# Altium PCB MC33886_driver_board.PcbDoc
Units mm, origin at the board's own origin, x right, y up, seen from the top; angles counter-clockwise.
Board outline 40 x 30 mm, 2 copper layers (Top Layer, Bottom Layer), stack 1.571 mm thick; 25 components, 22 nets, 114 pads, 133 vias.
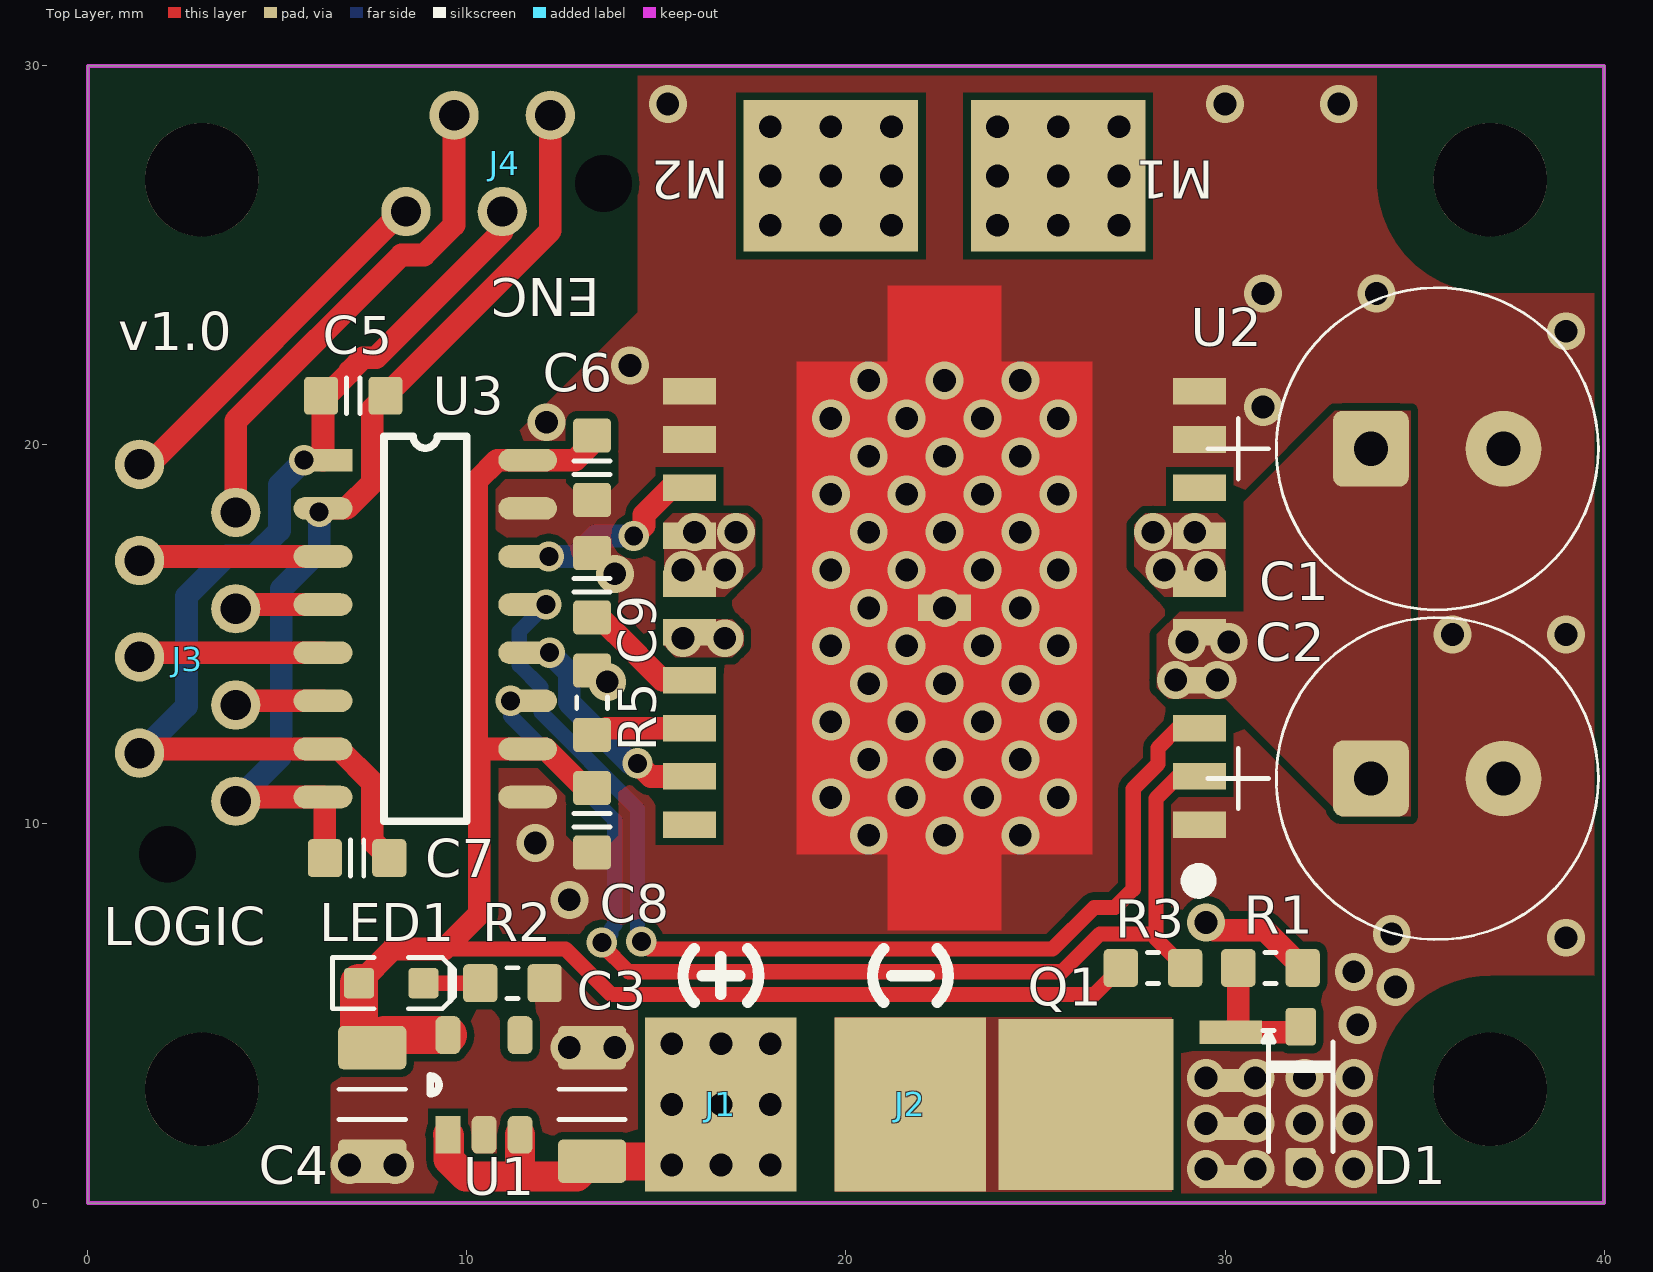
[diagram p0: Top Layer view]
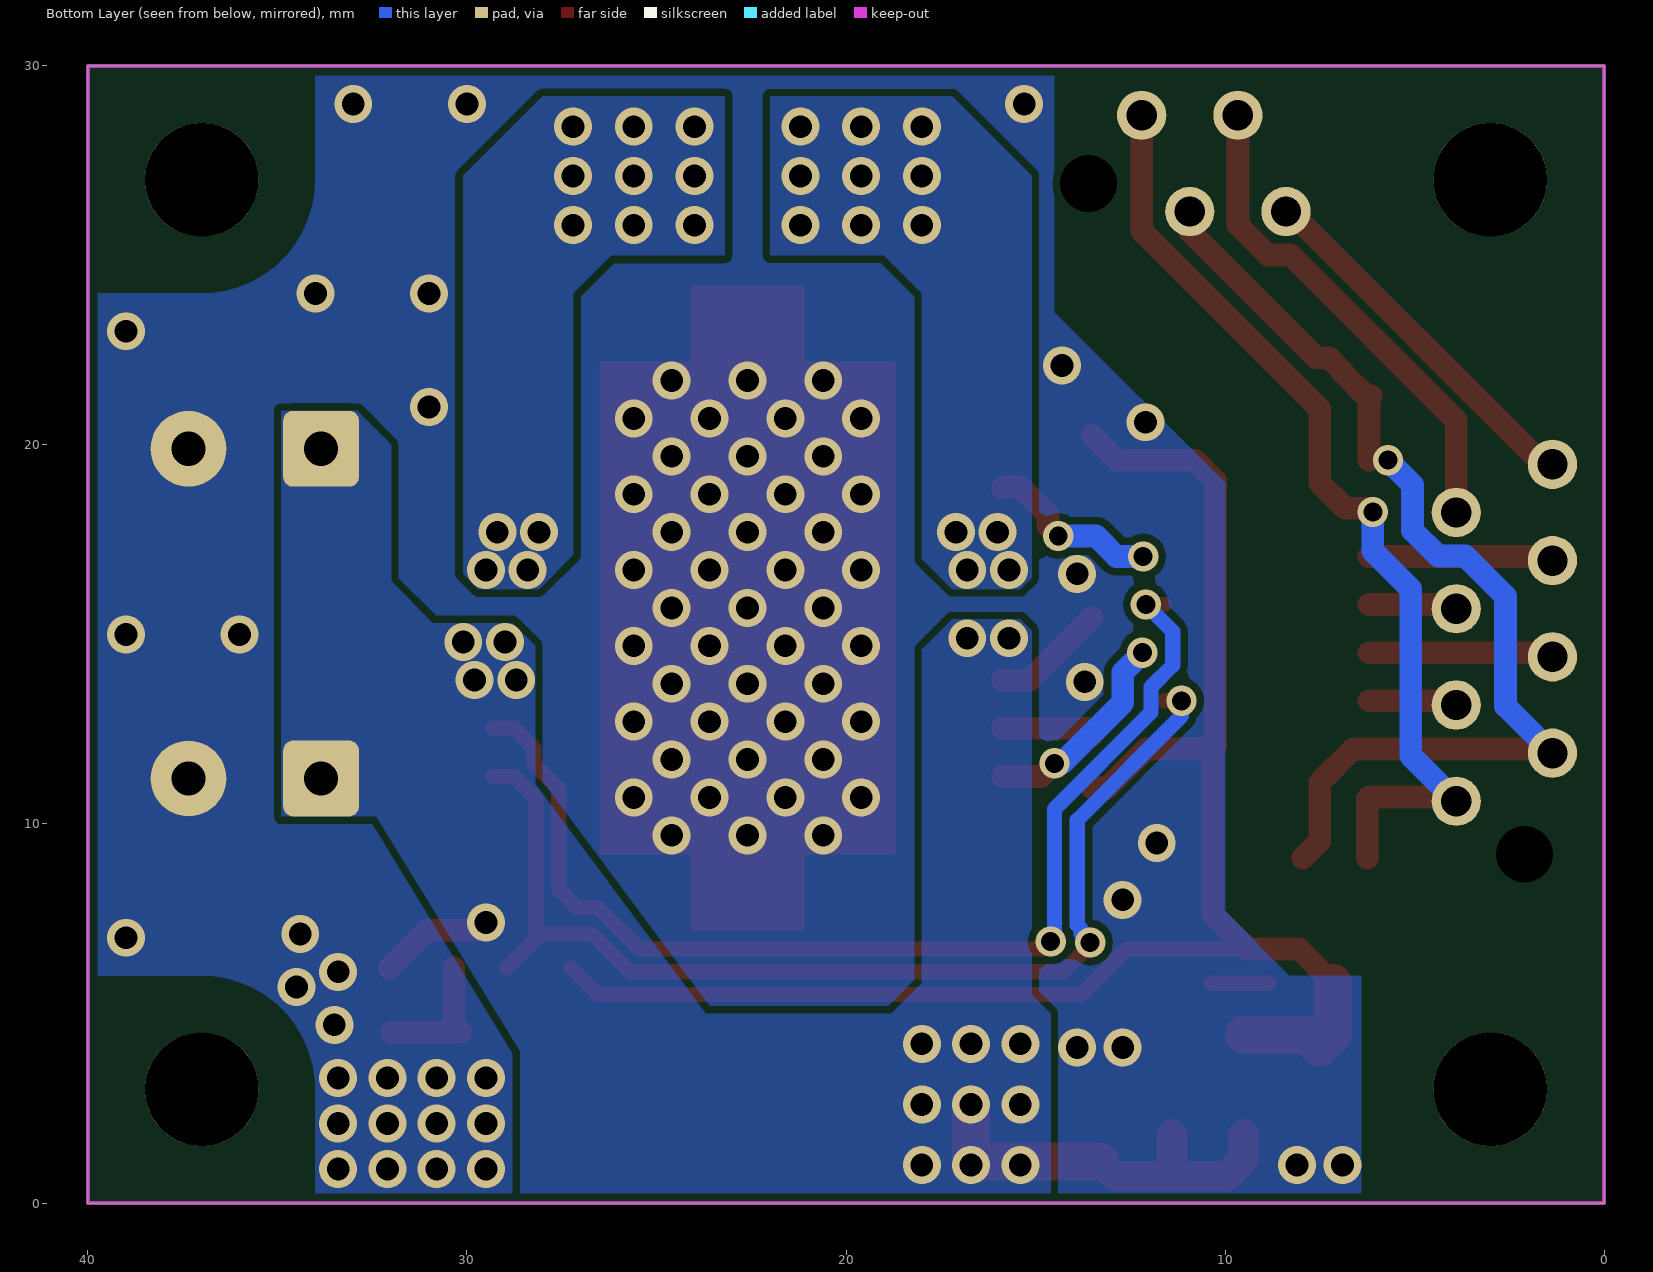
[diagram p1: Bottom Layer view, seen from below]

## Layer stack, top to bottom
Top Solder: solder mask 0.0102, Solder Resist, Dk 3.5
Top Layer: signal copper 0.0356
Dielectric 1: dielectric 1.5, FR-4, Dk 4.8
Bottom Layer: signal copper 0.0356
Bottom Solder: solder mask 0.0102, Solder Resist, Dk 3.5

## Board outline
0,0 0,30 40,30 40,0

## Design rules (kind name [scope] priority, off if disabled: settings)
Clearance [All] p1: gap=0.2 ignorepadtopadclearanceinfootprint=FALSE except(0: Arc-Hole Track-Hole SMDPad-Hole THPad-Hole Via-Hole Fill-Hole Poly-Hole Region-Hole Text-Hole)
ComponentClearance [All] p1: gap=0.2 collisioncheckmode=3 verticalgap=0.2 showdistances=FALSE
PolygonConnect [All] p1: connectstyle=Direct reliefconductorwidth=0.254 reliefentries=4 polygonreliefangle="90 Angle" airgapwidth=0.254
RoomDefinition MC33886_driver_board [InComponentClass('MC33886_driver_board')] p1: confinementstyle=ConfineIn formatcopy=TRUE lockcomponents=FALSE outline -15,-15 112,-15 112,77 -15,77
RoutingVias [All] p1: holewidth=0.6 width=1 viastyle="Through Hole" minholewidth=0.5 minwidth=0.8 maxholewidth=5 maxwidth=10
SolderMaskExpansion SolderMaskExpansionTentedVia [IsVia And (Not IsTestpoint)] p1: expansion=-5
SolderMaskExpansion [All] p2: expansion=0.102
Width [All] p1: maxlimit=10 minlimit=0.3 preferedwidth=0.4 minimp=50.000000 maximp=50.000000 favimp=50.000000
29 further rules are at their usual default settings.

## Components (designator, comment, footprint, x,y, rotation, side; value= is the part's Value field where it differs from the comment)
C1 "220u" CAPE3.5mm 35.6,19.9 r0 top value=220µ
C2 "220u" CAPE3.5mm 35.6,11.2 r0 top value=220µ
C3 "10u" CAPC3216X180N 13.3,2.6 r90 top value=10µ
C4 "10u" CAPC3216X180N 7.5,2.6 r270 top value=10µ
C5 "100n" CAPC1608X90N 7,21.3 r180 top value=10n
C6 "100n" CAPC1608X90N 13.3,19.4 r90 top value=10n
C7 "100n" CAPC1608X90N 7.1,9.1 r0 top value=10n
C8 "100n" CAPC1608X90N 13.3,10.1 r90 top value=10n
C9 "33n" CAPC1608X90N 13.3,16.3 r90 top value=10n
D1 "12V" SOD123 32,2.8 r270 top
J1 "12V_IN" POWER-PAD 16.7,2.6 r0 top
J2 "GND_IN" POWER-PAD 21.7,2.6 r0 top
J3 "LOGIC" MICRO-MATCH-8 3.9,10.6 r270 top
J4 "ENC" MICRO-MATCH-4 12.2,28.7 r0 top
LED1 "White" LED-0603-GREEN 8,5.8 r0 top
M1 "HEADER-1" POWER-PAD 25.6,27.1 r270 top
M2 "HEADER-1" POWER-PAD 19.6,27.1 r90 top
Q1 "MOSFET-N" SOT669 27.5,2.6 r180 top
R1 "100k" RESC1608X55N 31.2,6.2 r180 top value=1K
R2 "1k" RESC1608X55N 11.2,5.8 r0 top value=1K
R3 "10k" RESC1608X55N 28.1,6.2 r0 top value=1K
R5 "10k" RESC1608X55N 13.3,13.2 r90 top value=1K
U1 "LDO-SOT23-5" SOT23-5 9.5,1.8 r90 top
U2 "MC33886" MC33886 22.6,15.7 r180 top
U3 "SI8641" SOIC16 6.2,19.6 r0 top

## Footprints (in the part's own frame and the unit in brackets; to place one, negate y for a bottom-side part, rotate by r counter-clockwise, add the part's x,y. Pads: shape width x height; smd on the part's side, far side on the other; paste and mask are expansions set on the pad)
CAPC1608X90N [mm] "Chip Capacitor, Body 1.6x0.8mm, EIA 0603, IPC Medium Density"
  round 0.254 on Mech15: 0(0,0)
  rrect25% 0.9x1 smd: 1(-0.85,0) 2(0.85,0)
  Top Layer pour cut-out: -0.6,0.5 -0.4,0.7 0.4,0.7 0.6,0.5 0.6,-0.5 0.4,-0.7 -0.4,-0.7 -0.6,-0.5
  silkscreen extent -0.18,-0.48 0.18,0.48, body extent -0.85,-0.45 0.85,0.45, height 0.89
CAPC3216X180N [mm] "Chip Capacitor, Body 3.2x1.6mm, 1.8mm H, EIA 1206, IPC Medium Density"
  round 0.508 on Mech15: 0(0,0)
  rrect25% 1.15x1.8 smd: 1(-1.5,0) 2(1.5,0)
  silkscreen extent -0.4,-0.88 0.4,0.88, body extent -1.7,-0.9 1.7,0.9, height 1.8
CAPE3.5mm [mm]
  round 0.508 on Mech15: 0(0,0)
  rrect25% 2x2 hole 0.9: 1(-1.75,0)
  round 2 hole 0.9: 2(1.75,0)
  silkscreen extent -6.05,-4.25 4.25,4.25, body extent -4.25,-4.25 4.22,4.23, height 7.1
LED-0603-GREEN [mm]
  round 0.254 on Mech15: 0(0,0)
  rrect25% 0.8x0.8 smd: A(-0.85,0) K(0.85,0)
  Top Layer pour cut-out: -0.5,0.5 0.5,0.5 0.5,-0.5 -0.5,-0.5
  silkscreen extent -1.55,-0.67 1.68,0.67, body extent -0.8,-0.4 0.8,0.4, height 0.75
MC33886 [mm]
  rect 1.4x0.7 smd: 1(-6.731,5.715) 2(-6.731,4.445) 3(-6.731,3.175) 4(-6.731,1.905) 5(-6.731,0.635) 6(-6.731,-0.635) 7(-6.731,-1.905) 8(-6.731,-3.175) 9(-6.731,-4.445) 10(-6.731,-5.715) 11(6.731,-5.715) 12(6.731,-4.445) 13(6.731,-3.175) 14(6.731,-1.905) 15(6.731,-0.635) 16(6.731,0.635) 17(6.731,1.905) 18(6.731,3.175) 19(6.731,4.445) 20(6.731,5.715) 21(0,0)
  Top Layer region: -1.5,6.5 -1.5,8.5 1.5,8.5 1.5,6.5 3.9,6.5 3.9,-6.5 1.5,-6.5 1.5,-8.5 -1.5,-8.5 -1.5,-6.5 -3.9,-6.5 -3.9,6.5
  silkscreen extent -6.92,6.98 -6.48,7.42, body extent -7.12,-8 7.13,8, height 3.21
MICRO-MATCH-4 [mm]
  round 1.3 hole 0.8: 1(0,0) 2(-1.27,-2.54) 3(-2.54,0) 4(-3.81,-2.54)
  round 0 hole 1.5 unplated: drill(1.4,-1.8)
  body extent -5.41,-3.77 1.6,1.23, height 4
MICRO-MATCH-8 [mm]
  round 1.3 hole 0.8: 1(0,0) 2(-1.27,-2.54) 3(-2.54,0) 4(-3.81,-2.54) 5(-5.08,0) 6(-6.35,-2.54) 7(-7.62,0) 8(-8.89,-2.54)
  round 0 hole 1.5 unplated: drill(1.4,-1.8)
  body extent -10.49,-3.77 1.6,1.23, height 4
POWER-PAD [mm]
  rect 4x4.6 smd: 1(0,0)
RESC1608X55N [mm] "Chip Resistor, Body 1.6x0.8mm, EIA 0603, IPC Medium Density"
  round 0.254 on Mech15: 0(0,0)
  rrect25% 0.9x1 smd: 1(-0.85,0) 2(0.85,0)
  Top Layer pour cut-out: -0.6,0.5 -0.4,0.7 0.4,0.7 0.6,0.5 0.6,-0.5 0.4,-0.7 -0.4,-0.7 -0.6,-0.5
  silkscreen extent -0.15,-0.41 0.15,0.41, body extent -0.87,-0.47 0.88,0.48, height 0.54
SOD123 [mm] "SOD-123; 2 Leads; Body 2.7 x 1.6 mm, (LxW)"
  round 0.508 on Mech15: 0(0,0)
  rrect25% 1x0.8 smd: A(1.85,0) K(-1.85,0)
  silkscreen extent -1.75,-1 1.45,0.85, body extent -1.95,-0.9 1.95,0.9, height 1.18
SOIC16 [mm]
  rect 1.55x0.6 smd: 1(0,0)
  oval 1.55x0.6 smd: 2(0,-1.27) 3(0,-2.54) 4(0,-3.81) 5(0,-5.08) 6(0,-6.35) 7(0,-7.62) 8(0,-8.89) 9(5.4,-8.89) 10(5.4,-7.62) 11(5.4,-6.35) 12(5.4,-5.08) 13(5.4,-3.81) 14(5.4,-2.54) 15(5.4,-1.27) 16(5.4,0)
  silkscreen extent 1.61,-9.53 3.79,0.64, body extent -0.25,-9.42 5.66,0.57, height 1.46
SOT23-5 [mm]
  rect 1x0.66 smd: 1(0,0)
  rrect50% 1x0.66 smd: 2(0,-0.95) 3(0,-1.9) 4(2.63,-1.9) 5(2.63,0)
  silkscreen extent 1.08,0.24 1.55,0.48, body extent 0.1,-2.48 2.6,0.53, height 1.11
SOT669 [mil]
  rect 182x178 smd: D(46,0)
  rect 65x24 smd: G(-104.33,-75) S(-104.33,75) S(-104.33,-25) S(-104.33,25)
  body extent -125,-99 135,97, height 43

## Part data
C1 C2: library part CAPE_220u_16V_THD, "Capacitor THT Alum Elec 220uF 20% 16V", Manufacturer 1=Nichicon, Manufacturer 2="Zhuhai Gree Xinyuan Electric", Manufacturer Part Number 1=UPW1C221MPD, Manufacturer Part Number 2=CD11C-220-16V, Package / Case="radial 8.0D x 7.0H x 3.5mm pitch", Ratings="16V; 80°C", Supplier Part Number 1=493-1783-ND, Tolerance=±20%, Material=Al, SCDType=undef, Supplier 1=Digi-Key
C3 C4: library part CAPC_10u_1206_16V, "Capacitor SMD Cer 10uF 10% 16V X7R 1206", Manufacturer 1=Kemet, Manufacturer Part Number 1=C1206C106K4RACTU, Package / Case="1206 (3216 metric)", Ratings="16V; X7R", Supplier Part Number 1=399-3525-1-ND, Tolerance=±10%, Material=ceramic, SCDType=spec, Supplier 1=Digi-Key
C5 C6 C7 C8 C9: library part CAPC_10n_0603_X7R_50V_10%, "Capacitor SMD Cer 10nF 10% 50V X7R 0603", Manufacturer 1="TDK Corporation", Manufacturer 2="AVX Corporation", Manufacturer Part Number 1=C1608X7R1H103K, Manufacturer Part Number 2=06035C103KAT2A, Package / Case="0603 (1608 metric)", Ratings="50V; X7R", Supplier Part Number 1=445-1311-1-ND, Tolerance=±10%, ComponentLink1Description=http://product.tdk.com/capacitor/mlcc/en/documents/mlcc_commercial_general_en.pdf, ComponentLink1URL=http://product.tdk.com/capacitor/mlcc/en/documents/mlcc_commercial_general_en.pdf, ComponentLink2Description=http://www.avx.com/docs/Catalogs/cx7r.pdf, ComponentLink2URL=http://www.avx.com/docs/Catalogs/cx7r.pdf, Material=ceramic, SCDType=spec, Supplier 1=Digi-Key, Supplier 2=Digi-Key, Supplier Part Number 2=478-1227-1-ND
D1: library part DIODE_ZENER_28V_500mW, "Diode Zener SMD 28V 0.5W SOD-123", Manufacturer 1="ON Semiconductor", Manufacturer Part Number 1=MMSZ5255BT1G, Package / Case=SOD-123, Ratings="28V; 0.5W", Supplier Part Number 1=MMSZ5255BT1GOSCT-ND, Tolerance=±5%, Diode Type=Zener, Material=Si, SCDType=source, Supplier 1=Digi-Key
J1 J2: library part HEADER-1
J3: library part HEADER-8
J4: library part HEADER-4
LED1: library part LED_SMD_Green_0603_570nm, "LED 0603 SMD Green 570nm 50mcd 20mA", Color=Green, Current - Test=20mA, Manufacturer 1="Kingbright Company LLC", Manufacturer Part Number 1=APT1608CGCK, Package / Case="0603 (1608 metric)", Ratings="20mcd min; 50 mcd typ; 570 nm", Supplier Part Number 1=754-1116-1-ND, Voltage - Forward (Vf) @ 10mA=2.0V, Voltage - Forward (Vf) Typ=2.1V, ComponentLink1Description=http://www.us.kingbright.com/images/catalog/SPEC/APT1608CGCK.pdf, ComponentLink1URL=http://www.us.kingbright.com/images/catalog/SPEC/APT1608CGCK.pdf, Lens Style/Size="Rectangle with Flat Top, 1.1mm x 0.8mm", Lens Type=Clear, Material=AlGaInP, RoHS 1="RoHS Compliant", SCDType=source, Supplier 1=Digi-Key, Viewing Angle=120°, Wavelength - Dominant=570nm, Wavelength - Peak=574nm
R1 R2 R3 R5: library part RES_1K_0603_1%, "Resistor SMD chip 1k Ohm 0.1W 1% 0603", Manufacturer 1=Yageo, Manufacturer Part Number 1=RC0603FR-071KL, Package / Case="0603 (1608 Metric)", Ratings=1/10W, Supplier Part Number 1=311-1.00KHRCT-ND, Tolerance=±1%, SCDType=spec, Supplier 1=Digi-Key
Q1: PROD_ID=IC-08089

## Free pads (board coordinates)
  round 3 hole 3 unplated: hole(3,3) hole(3,27) hole(37,3) hole(37,27)

## Via types
v1: diameter 1, hole 0.6, Top Layer to Bottom Layer, 123 vias
v2: diameter 0.8, hole 0.5, Top Layer to Bottom Layer, 10 vias

## Nets (pads, with @x,y where several pads share a name; then routed paths per layer and width w, separated by ;. In a path a pad name is that pad's centre, name@x,y a point inside that pad or via, vN(x,y) a via of type N, cw(c..) or ccw(c..) an arc to the next point about the centre after c; other vN are vias at no path point)
12V: C1.1 C2.1 C3.1 J1.1 R1.1 U1.1 U1.3 U2.4 U2.5 U2.16 | length 13.9
  Top Layer w0.6: v1(29.5,7.4) 29.7,7.2 31.05,7.2 R1.1
  Top Layer w0.8: U1.1 9.52,1.78 9.52,1.148 9.968,0.7 11.6,0.7 ; U1.3 11.4,0.9 11.6,0.7 ; C3.1 12.9,0.7 11.6,0.7
  Top Layer w1: C3.1 16.7,1.1 v1(16.7,2.6)
  other v1: 15.4,1 16.7,1 18,1 15.4,2.6 18,2.6 15.4,4.2 16.7,4.2 18,4.2 28.7,13.8 29.8,13.8 29,14.8 30.1,14.8 15.7,14.9 16.8,14.9
A5V: C5.2 C7.2 J3.2 J4.2 U3.1 U3.7 | length 27.5
  Top Layer w0.6: J3.2 1.47,11.98 U3.7 6.62,11.98 7.5,11.1 7.5,9.55 C7.2 ; U3.1 6.2,21.25 C5.2 6.288,21.3 6.9,21.912 6.9,21.941 7.259,22.3 7.6,22.3 10.93,25.63 J4.2
  Bottom Layer w0.6: J3.2 2.6,13.11 2.6,16.006 3.664,17.07 4.376,17.07 5.05,17.744 5.05,18.95 v2(5.7,19.6)
AGND: C5.1 C7.1 J3.1 J4.1 U3.2 U3.8 | length 25.9
  Top Layer w0.6: J3.1 4.01,10.71 U3.8 6.25,10.66 C7.1 ; v2(6.1,18.23) U3.2 6.83,18.33 7.5,19 7.5,20.95 C5.1 12.2,25.65 J4.1
  Bottom Layer w0.6: J3.1 5.1,11.8 5.1,16.2 6.1,17.2 v2(6.1,18.23)
DIR1: J3.5 U3.4 | length 2.3
  Top Layer w0.6: J3.5 4.01,15.79 U3.4
DIR1_D: U2.3 U3.13 | length 30.1
  Top Layer w0.4: U3.13 v2(12.09,15.79) ; v2(14.6,6.9) 14.8,6.7 25.451,6.7 26.551,7.8 27.1,7.8 27.577,8.277 27.577,10.926 28.231,11.58 28.231,12.005 28.751,12.525 U2.3
  Bottom Layer w0.4: v2(12.09,15.79) 11.38,15.08 11.38,14.189 11.95,13.619 11.95,12.95 14.5,10.4 14.5,7.083 14.459,7.041 v2(14.6,6.9)
DIR2: J3.4 U3.5 | length 4.9
  Top Layer w0.6: J3.4 1.47,14.52 U3.5
DIR2_D: U2.19 U3.12 | length 5.5
  Top Layer w0.6: v2(14.5,11.6) 14.845,11.255 U2.19
  Bottom Layer w0.6: v2(12.18,14.52) 12.7,14 12.7,13.2 14.3,11.6 v2(14.5,11.6)
ENCA: J3.7 J4.3 | length 13.2
  Top Layer w0.6: J3.7 3.9,20.641 8.269,25.01 8.866,25.01 9.66,25.804 J4.3
ENCB: J3.8 J4.4 | length 9.8
  Top Layer w0.6: J3.8 1.617,19.49 8.287,26.16 J4.4
FAULT: J3.3 U3.6 | length 2.3
  Top Layer w0.6: J3.3 4.01,13.25 U3.6
FAULT_D: R3.2 U2.2 U3.11 | length 29.6
  Top Layer w0.4: v2(11.15,13.25) U3.11 ; v2(13.558,6.873) 13.558,6.81 14.269,6.1 25.7,6.1 26.573,6.973 26.7,7.1 28.05,7.1 ; R3.2 28.177,6.973 28.177,10.677 28.755,11.255 U2.2
  Bottom Layer w0.4: v2(11.15,13.25) 11.15,12.85 13.9,10.1 13.9,7.331 13.8,7.231 13.8,7.1 13.573,6.873 v2(13.558,6.873)
NetC9_1: C9.1 U2.17 | length 3.1
  Top Layer w0.6: C9.1@13.5,15.45 13.9,15.05 13.914,15.05 14.5,14.464 14.5,14.45 15.155,13.795 U2.17
NetD1_K: D1.K Q1.G R1.2 | length 3.6
  Top Layer w0.6: R1.2 30.35,4.705 Q1.G D1.K@32,4.505
NetJ2_1: J2.1 Q1.D
NetLED1_K: LED1.K R2.1 | length 1.5
  Top Layer w0.4: LED1.K R2.1
NetM1_1: M1.1 U2.6 U2.7
  other v1: 28.4,16.7 29.5,16.7 28.1,17.7 29.2,17.7 24,25.8 25.6,25.8 27.2,25.8 24,27.1 25.6,27.1 27.2,27.1 24,28.4 25.6,28.4 27.2,28.4
NetM2_1: M2.1 U2.14 U2.15
  other v1: 15.7,16.7 16.8,16.7 16,17.7 17.1,17.7 18,25.8 19.6,25.8 21.2,25.8 18,27.1 19.6,27.1 21.2,27.1 18,28.4 19.6,28.4 21.2,28.4
NetR5_1: R5.1 U2.18 | length 2.6
  Top Layer w0.4: R5.1@13.5,12.35 R5.1@13.5,12.525
  Top Layer w0.6: R5.1@13.5,12.35 13.675,12.525 U2.18
P5V: C4.1 C6.2 C8.2 LED1.A R3.1 U1.5 U3.10 U3.16 | length 45.4
  Top Layer w0.4: 9.4,6.7 12.6,6.7 12.9,6.4 13.8,5.5 26.55,5.5 R3.1
  Top Layer w0.6: LED1.A 8.05,6.7 9.4,6.7 10.325,7.625 10.325,12 ; C8.2@13.5,10.95 C8.2 13.105,10.95 12.075,11.98 U3.10 10.345,11.98 10.325,12 ; C6.2@13.5,20.25 12.85,19.6 U3.16 10.8,19.6 10.25,19.05 10.25,12.075 10.325,12
  Top Layer w1: LED1.A 7.15,4.45 C4.1 7.83,4.43 U1.5
PGND: C1.2 C2.2 C3.2 C4.2 C6.1 C8.1 C9.2 D1.A Q1.S R2.2 R5.2 U1.2 U2.1 U2.9 U2.10 U2.11 U2.12 U2.21 U3.9 U3.15
  other v1: 29.5,0.9 30.8,0.9 32.1,0.9 33.4,0.9 6.9,1 8.1,1 29.5,2.1 30.8,2.1 32.1,2.1 33.4,2.1 29.5,3.3 30.8,3.3 32.1,3.3 33.4,3.3 12.7,4.1 13.9,4.1 33.5,4.7 34.5,5.7 33.4,6.1 39,7 34.4,7.1 12.7,8 11.8,9.5 20.6,9.7 22.6,9.7 24.6,9.7 19.6,10.7 21.6,10.7 23.6,10.7 25.6,10.7 20.6,11.7 22.6,11.7 24.6,11.7 19.6,12.7 21.6,12.7 23.6,12.7 25.6,12.7 20.6,13.7 22.6,13.7 24.6,13.7 13.7,13.75 19.6,14.7 21.6,14.7 23.6,14.7 25.6,14.7 36,15 39,15 20.6,15.7 22.6,15.7 24.6,15.7 13.9,16.6 19.6,16.7 21.6,16.7 23.6,16.7 25.6,16.7 20.6,17.7 22.6,17.7 24.6,17.7 19.6,18.7 21.6,18.7 23.6,18.7 25.6,18.7 20.6,19.7 22.6,19.7 24.6,19.7 12.1,20.6 19.6,20.7 21.6,20.7 23.6,20.7 25.6,20.7 31,21 20.6,21.7 22.6,21.7 24.6,21.7 14.3,22.1 39,23 31,24 34,24 15.3,29 30,29 33,29
PWM: J3.6 U3.3 | length 4.9
  Top Layer w0.6: J3.6 1.47,17.06 U3.3
PWM_D: U2.13 U3.14 | length 4.4
  Top Layer w0.4: U2.13 U2.13@15.869,18.9
  Top Layer w0.6: v2(14.4,17.6) 14.669,17.869 14.669,18.162 15.407,18.9 15.834,18.9 15.839,18.895 15.844,18.9 U2.13
  Bottom Layer w0.6: v2(12.16,17.06) 12.86,17.06 13.4,17.6 v2@14.15,17.6
pads on no net: C1.0 C2.0 C3.0 C4.0 C5.0 C6.0 C7.0 C8.0 C9.0 D1.0 J3.drill J4.drill LED1.0 R1.0 R2.0 R3.0 R5.0 U1.4 U2.8 U2.20

## Polygon pours and split planes (outlines as drawn)
NetM2_1 on Bottom Layer "Top Layer-No Net" (solid, pour order 2): 15.1,16.5 15.1,27.1 17.2,29.2 22,29.2 22,25 19,25 18,24 18,17 17.2,16.2 15.4,16.2
NetM1_1 on Bottom Layer "Top Layer-No Net" (solid, pour order 4): 30.1,16.6 30.1,27.1 28,29.2 23.2,29.2 23.2,25 26.2,25 27.2,24 27.2,17.1 28.1,16.2 29.7,16.2
12V on Bottom Layer "Top Layer-No Net" (solid, pour order 6): 15.1,15.1 15.1,5.5 14.6,5 14.6,0 28.6,0 28.6,4 32.389,10.2 34.9,10.2 34.9,20.9 32.9,20.9 32,20 32,16.4 30.9,15.3 28.8,15.3 28.2,14.7 28.2,11.065 23.7,5 18.8,5 18,5.8 18,14.6 17.2,15.4 15.4,15.4
PGND on Bottom Layer "Top Layer-No Net" (solid, pour order 24): 6.4,0 34,0 34,3 cw(c37,3) 37,6 40,6 40,24 37,24 cw(c37,27) 34,27 34,30 14.5,30 14.5,23.5 10,19 10,7.7 8.3,6 6.4,6
12V on Top Layer "Top Layer-No Net" (solid, pour order 10): 34.9,20.9 32.9,20.9 30.5,18.5 30.5,15.6 28.8,15.6 28.2,15 28.2,13.6 28.5,13.3 30,13.3 33.1,10.2 34.9,10.2
NetM2_1 on Top Layer "Top Layer-No Net" (solid, pour order 12): 15.2,16 15.2,18 15.4,18.2 17.4,18.2 17.6,18 17.6,16.8 16.8,16
12V on Top Layer "Top Layer-No Net" (solid, pour order 14): 15.2,15.4 17,15.4 17.299,15.101 17.299,14.699 17.001,14.401 15.499,14.401 15.2,14.7
NetJ2_1 on Top Layer "Top Layer-No Net" (solid, pour order 16): 19.7,4.9 19.7,0.3 28.6,0.3 28.6,4.9 19.7,4.9
PGND on Top Layer "Top Layer-No Net" (solid, remove dead copper, pour order 18): 6.4,0 34,0 34,3 cw(c37,3) 37,6 40,6 40,24 37,24 cw(c37,27) 34,27 34,30 14.5,30 14.5,23.5 10,19 10,6 6.4,6
NetM1_1 on Top Layer "Top Layer-No Net" (solid, pour order 8): 30,16 30,18 29.801,18.199 27.899,18.199 27.601,17.901 27.601,16.799 28.4,16

## Keep-outs
Keep-Out Layer:
  the board outline again, w0.1

## Silkscreen, mask and mechanical layers (free items; w line width, h text height)
Top Overlay:
  lines w0.3: 15.993,5.293 cw(c16.7,6) 15.993,6.707 ; 16.2,6 17.2,6 ; 16.7,5.5 16.7,6.5 ; 17.407,5.293 ccw(c16.7,6) 17.407,6.707 ; 20.993,5.293 cw(c21.7,6) 20.993,6.707 ; 21.2,6 22.2,6 ; 22.407,5.293 ccw(c21.7,6) 22.407,6.707
  text "ENC" at 13.5,24.4 h1 r180
  text "v1.0" at 0.8,22.5 h1
  text "LOGIC" at 0.4,6.8 h1
Bottom Solder:
  region: 18.7,22.2 18.7,9.2 26.5,9.2 26.5,22.2